# Altium PCB bOARD.PcbDoc
Units mil, origin at the board's own origin, x right, y up, seen from the top; angles counter-clockwise.
Board outline 6000 x 4000 mil, 2 copper layers (Top Layer, Bottom Layer); 34 components, 41 nets, 148 pads, 0 vias.
Unrouted connection lines stored in the file: 97.
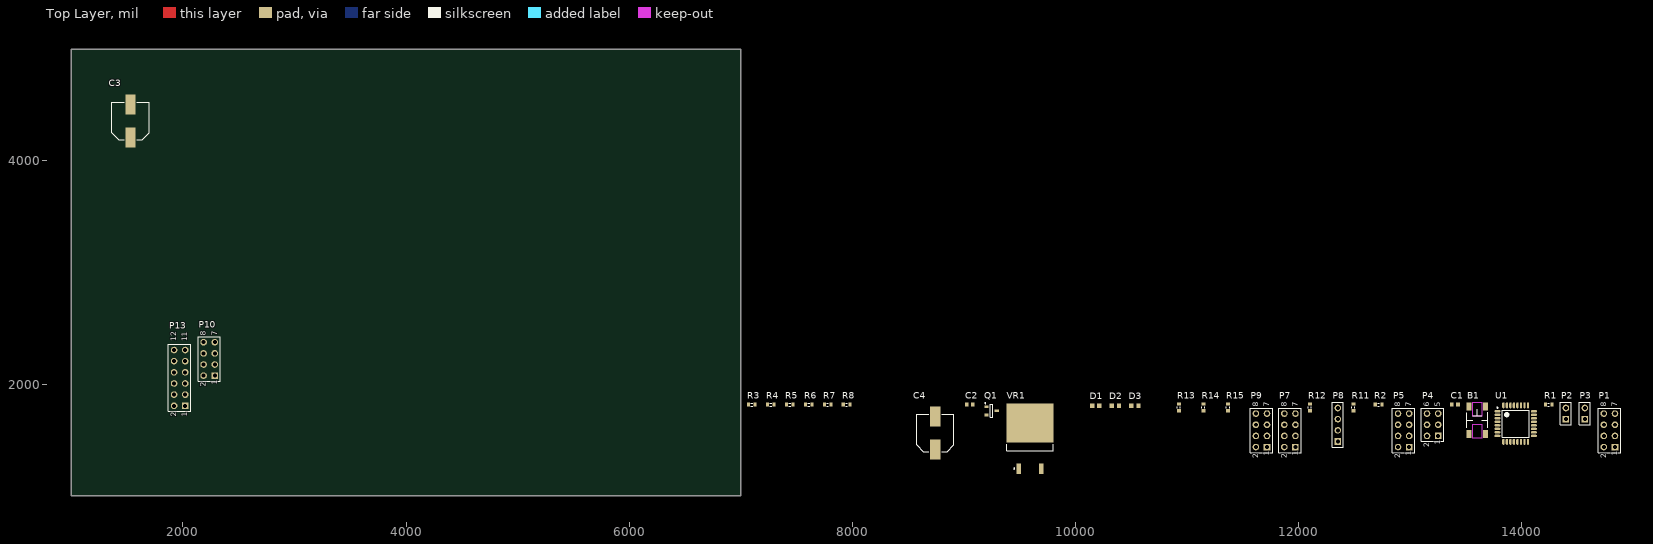
[diagram p0: Top Layer view]
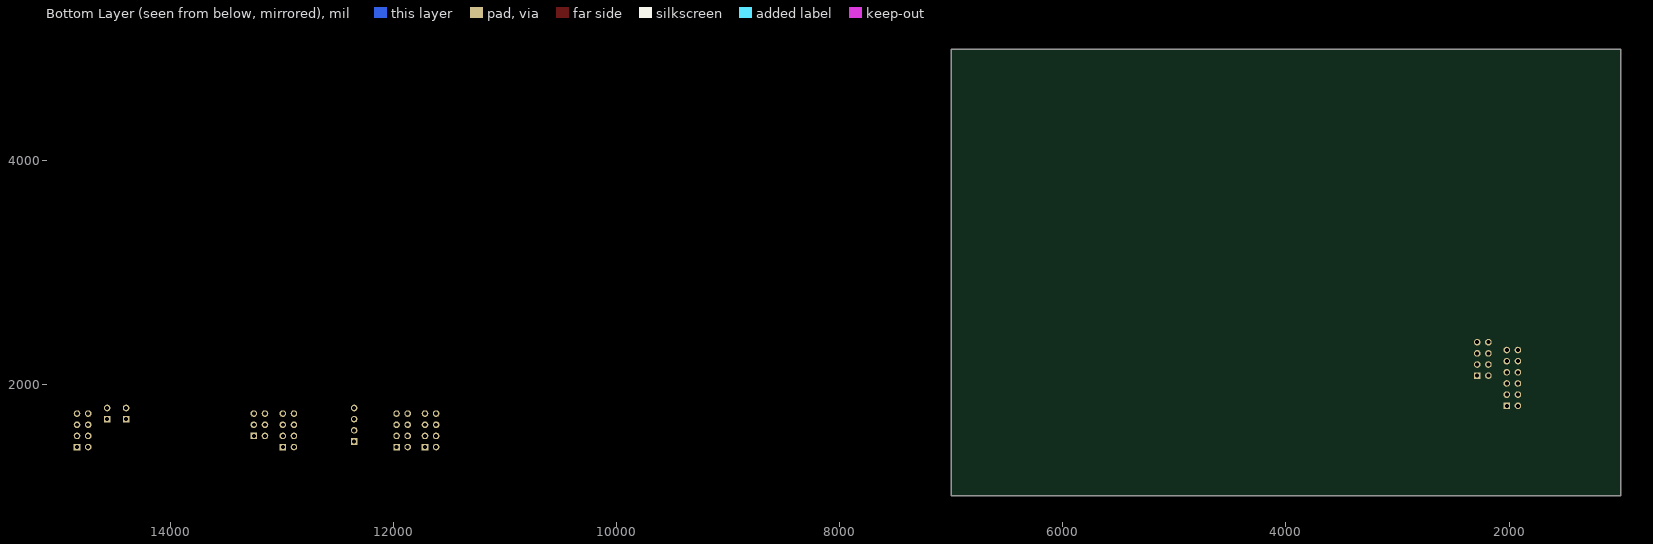
[diagram p1: Bottom Layer view, seen from below]

## Layer stack, top to bottom
Top Solder: solder mask 0.4, Solder Resist, Dk 3.5
Top Layer: signal copper 1.4
Dielectric 1: dielectric 12.6, FR-4, Dk 4.8
Bottom Layer: signal copper 1.4
Bottom Solder: solder mask 0.4, Solder Resist, Dk 3.5

## Board outline
1000,1000 7000,1000 7000,5000 1000,5000

## Design rules (kind name [scope] priority, off if disabled: settings)
Clearance [All] p1: gap=10
PolygonConnect [All] p1: connectstyle=Relief reliefconductorwidth=10 reliefentries=4 polygonreliefangle="90 Angle" airgapwidth=10
RoomDefinition Sheet1 [InComponentClass('Sheet1')] p1: confinementstyle=ConfineIn formatcopy=TRUE lockcomponents=FALSE outline 7045,1060 14900,1060 14900,1945 7045,1945
RoutingVias [All] p1: holewidth=28 width=50 viastyle="Through Hole" minholewidth=28 minwidth=50 maxholewidth=28 maxwidth=50
SolderMaskExpansion [All] p1: expansion=4
Width [All] p1: maxlimit=10 minlimit=10 preferedwidth=10
30 further rules are at their usual default settings.

## Components (designator, comment, footprint, x,y, rotation, side; value= is the part's Value field where it differs from the comment)
B1 "Button" "SMT Tactile Button" 13605,1675 r90 top
C1 "Cap" 1608[0603] 13405,1815 r0 top
C2 "Cap" 1608[0603] 9055,1815 r0 top
C3 "Cap Pol2" CAPAE9983X105M 1530,4360 r90 top
C4 "Cap Pol2" CAPAE9983X105M 8745,1560 r90 top
D1 "LED1" L0603 10185,1805 r0 top
D2 "LED1" L0603 10360,1805 r0 top
D3 "LED1" L0603 10535,1805 r0 top
P1 "Header 4X2" HDR2X4 14840,1435 r90 top
P2 "Header 2" HDR1X2 14400,1685 r90 top
P3 "Header 2" HDR1X2 14570,1685 r90 top
P4 "Header 3X2" HDR2X3 13255,1535 r90 top
P5 "Header 4X2" HDR2X4 12995,1435 r90 top
P7 "Header 4X2" HDR2X4 11975,1435 r90 top
P8 "Header 4" HDR1X4 12355,1485 r90 top
P9 "Header 4X2" HDR2X4 11720,1435 r90 top
P10 "Header 4X2" HDR2X4 2285,2075 r90 top
P13 "Header 6X2" HDR2X6 2020,1805 r90 top
Q1 "MOSFET-P" SOT23-3 9250,1760 r0 top
R1 "Res3" J1-0603 14245,1815 r0 top
R2 "Res3" J1-0603 12720,1815 r0 top
R3 "Res3" J1-0603 7100,1815 r0 top
R4 "Res3" J1-0603 7270,1815 r0 top
R5 "Res3" J1-0603 7440,1815 r0 top
R6 "Res3" J1-0603 7610,1815 r0 top
R7 "Res3" J1-0603 7780,1815 r0 top
R8 "Res3" J1-0603 7950,1815 r0 top
R11 "Res3" J1-0603 12495,1790 r90 top
R12 "Res3" J1-0603 12105,1790 r90 top
R13 "Res3" J1-0603 10930,1790 r90 top
R14 "Res3" J1-0603 11150,1790 r90 top
R15 "Res3" J1-0603 11370,1790 r90 top
U1 "ATmega32M1-AU" 32A_L 13950,1645 r0 top
VR1 "Volt Reg" D2PAK_N 9595,1510 r90 top

## Footprints (in the part's own frame and the unit in brackets; to place one, negate y for a bottom-side part, rotate by r counter-clockwise, add the part's x,y. Pads: shape width x height; smd on the part's side, far side on the other; paste and mask are expansions set on the pad)
32A_L [mm] "Thin QFP, 32-Leads, Body 7x7mm, Pitch 0.8mm, IPC High Density"
  oval 1.35x0.55 smd: 1(-4.15,2.8) 2(-4.15,2) 3(-4.15,1.2) 4(-4.15,0.4) 5(-4.15,-0.4) 6(-4.15,-1.2) 7(-4.15,-2) 8(-4.15,-2.8) 17(4.15,-2.8) 18(4.15,-2) 19(4.15,-1.2) 20(4.15,-0.4) 21(4.15,0.4) 22(4.15,1.2) 23(4.15,2) 24(4.15,2.8)
  oval 0.55x1.35 smd: 9(-2.8,-4.15) 10(-2,-4.15) 11(-1.2,-4.15) 12(-0.4,-4.15) 13(0.4,-4.15) 14(1.2,-4.15) 15(2,-4.15) 16(2.8,-4.15) 25(2.8,4.15) 26(2,4.15) 27(1.2,4.15) 28(0.4,4.15) 29(-0.4,4.15) 30(-1.2,4.15) 31(-2,4.15) 32(-2.8,4.15)
  silkscreen extent -4.27,-3.05 3.05,3.75, body extent -3.5,-3.5 3.5,3.5, height 1.2
1608[0603] [mm] "Chip Capacitor, Body 1.6x0.8mm, IPC High Density"
  rect 0.8x0.9 smd: 1(-0.7,0) 2(0.7,0)
  body extent -0.87,-0.48 0.87,0.48, height 1.3
CAPAE9983X105M [mm] "Aluminum Electrolytic Capacitor, Body 8.30x8.30x10.50mm, IPC Low Density"
  rect 4.55x2.3 smd: 1(-3.75,0) 2(3.75,0)
  silkscreen extent -4.25,-4.25 4.25,4.25, body extent -4.25,-4.25 4.25,4.25, height 10.5
D2PAK_N [mm] "D2-PAK, 4-Leads, Body 8.8x10.4mm, Pitch 2.54mm, Lead Span 15.1mm, IPC Medium Density"
  rect 2.4x1.05 smd: 1(-6.8,2.54) 3(-6.8,-2.54)
  rect 8.9x10.65 smd: 2(3.55,0)
  silkscreen extent -6.92,-5.25 -1.3,5.25, body extent -2.7,-5.28 6.3,5.28, height 4.69
HDR1X2 [mm] "Connector; Header; 2 Position"
  rect 1.5x1.5 hole 0.9: 1(0,0)
  round 1.5 hole 0.9: 2(2.54,0)
  silkscreen extent -1.27,-1.27 3.81,1.27
HDR1X4 [mm] "Connector; Header; 4 Position"
  rect 1.5x1.5 hole 0.9: 1(0,0)
  round 1.5 hole 0.9: 2(2.54,0) 3(5.08,0) 4(7.62,0)
  silkscreen extent -1.27,-1.27 8.89,1.27
HDR2X3 [mm] "Connector; Header; 3x2 Position"
  rect 1.5x1.5 hole 0.9: 1(0,0)
  round 1.5 hole 0.9: 2(0,2.54) 3(2.54,0) 4(2.54,2.54) 5(5.08,0) 6(5.08,2.54)
  silkscreen extent -1.27,-1.27 6.35,3.81
HDR2X4 [mm] "Connector; Header; 4x2 Position"
  rect 1.5x1.5 hole 0.9: 1(0,0)
  round 1.5 hole 0.9: 2(0,2.54) 3(2.54,0) 4(2.54,2.54) 5(5.08,0) 6(5.08,2.54) 7(7.62,0) 8(7.62,2.54)
  silkscreen extent -1.27,-1.27 8.89,3.81
HDR2X6 [mm] "Connector; Header; 6x2 Position"
  rect 1.5x1.5 hole 0.9: 1(0,0)
  round 1.5 hole 0.9: 2(0,2.54) 3(2.54,0) 4(2.54,2.54) 5(5.08,0) 6(5.08,2.54) 7(7.62,0) 8(7.62,2.54) 9(10.16,0) 10(10.16,2.54) 11(12.7,0) 12(12.7,2.54)
  silkscreen extent -1.27,-1.27 13.97,3.81
J1-0603 [mm] "Chip Resistor, Body 1.6x0.8mm, IPC High Density"
  rect 0.7x0.9 smd: 1(-0.75,0) 2(0.75,0)
  silkscreen extent -0.2,-0.35 0.2,0.35, body extent -0.85,-0.48 0.85,0.48, height 0.9
L0603 [mm]
  rect 0.95x1 smd: 1(-0.8,0) 2(0.8,0)
"SMT Tactile Button" [mm]
  rect 1.8x1.1 smd: 1(3.1,1.85) 2(-3.1,1.85) 3(-3.1,-1.85) 4(3.1,-1.85)
  Top Layer keep-out region: -4,-1.125 -1,-1.125 -1,1.125 -4,1.125
  Top Layer keep-out region: 1.025,-1.125 4.025,-1.125 4.025,1.125 1.025,1.125
  silkscreen extent -1.75,-2.4 2.5,2.4
SOT23-3 [mm]
  rect 1x0.6 smd: 1(-1.15,0.95) 2(-1.15,-0.95) 3(1.15,0)
  silkscreen extent -1.52,-1.45 0.33,1.87

## Part data
B1: library part Switch
C1 C2: "Capacitor"
C3 C4: "Polarized Capacitor (Axial)"
D1 D2 D3: "Typical RED GaAs LED"
P1 P5 P7 P9 P10: "Header, 4-Pin, Dual row"
P2 P3: "Header, 2-Pin"
P4: "Header, 3-Pin, Dual row"
P8: "Header, 4-Pin"
P13: "Header, 6-Pin, Dual row"
Q1: "P-Channel MOSFET"
R1 R2 R3 R4 R5 R6 R7 R8 R11 R12 R13 R14 R15: "Resistor"
U1: "8-bit AVR Microcontroller, 2.7-5.5V, 16MHz, 32KB Flash, 1KB EEPROM, 2KB SRAM, Industrial Grade (-40° to +85°C), 32-Pin TQFP"
VR1: "Voltage Regulator"

## Nets (pads, with @x,y where several pads share a name; then routed paths per layer and width w, separated by ;. In a path a pad name is that pad's centre, name@x,y a point inside that pad or via, vN(x,y) a via of type N, cw(c..) or ccw(c..) an arc to the next point about the centre after c; other vN are vias at no path point)
3S(11.1V): C3.1 C4.1 P1.4 P2.1 P3.1 P5.4 P7.4 P9.4 P10.4 VR1.1
5V: C1.2 C2.2 P1.2 P4.2 P5.2 P7.2 P8.1 P9.2 P10.2 Q1.1 R1.2 R3.2 R4.2 R5.2 U1.4 U1.19 VR1.3
GND: B1.2 C1.1 C2.1 C3.2 C4.2 D1.2 D2.2 D3.2 P1.8 P2.2 P3.2 P4.6 P5.8 P7.8 P8.2 P9.8 P10.8 P13.2 P13.4 P13.6 P13.8 P13.10 P13.12 R12.2 U1.5 U1.20 VR1.2
HI-BEAM: Q1.2 U1.15
M1.1: P5.5 U1.17
M1.2: P5.7 U1.16
M2.1: P7.5 U1.24
M2.2: P7.7 U1.23
M3.1: P9.5 U1.26
M3.2: P9.7 U1.7
M4.1: P10.5 U1.32
M4.2: P10.7 U1.18
MISO: P4.1 P5.3 P9.1 U1.8
MOSI: P4.4 P5.1 U1.9
NetD1_1: D1.1 R13.1
NetD2_1: D2.1 R14.1
NetD3_1: D3.1 R15.1
NetQ1_3: Q1.3 R6.2 R7.2 R8.2
NetR11_2: R11.2 R12.1
PULSE: R15.2 U1.11
PWMM2.1: P7.1 U1.10
PWMM2.2: P7.3 U1.1
PWMM3.1: U1.3
PWMM3.2: P9.3 U1.27
PWMM4.1: P4.3 P10.1 U1.30
PWMM4.2: P10.3 U1.28
PWMM5.1: U1.29
RESET: B1.4 P4.5 R1.1 U1.31
RXD: R2.1 R14.2 U1.12
RXD_3.3V: P8.4 R2.2 R11.1
S1-IN1: P1.1 U1.22
S1-IN2: P1.3 U1.25
S1-IN3: P1.5 U1.13
S1-IN4: P1.7 U1.14
TORCH1: P13.1 R3.1
TORCH2: P13.3
TORCH3: P13.5 R5.1
TORCH4: P13.7 R6.1
TORCH5: P13.9 R7.1
TORCH6: P13.11 R8.1
TXD: P8.3 R13.2 U1.2
pads on no net: B1.1 B1.3 P1.6 P5.6 P7.6 P9.6 P10.6 R4.1 U1.6 U1.21

## Text inside footprints (layer, text, board x,y; h text height)
P1: Top Overlay "2" at 14760,1335 h50 r90; Top Overlay "1" at 14860,1355 h50 r90; Top Overlay "7" at 14860,1795 h50 r90; Top Overlay "8" at 14760,1795 h50 r90
P4: Top Overlay "6" at 13175,1795 h50 r90; Top Overlay "5" at 13275,1795 h50 r90; Top Overlay "2" at 13175,1435 h50 r90; Top Overlay "1" at 13275,1455 h50 r90
P5: Top Overlay "2" at 12915,1335 h50 r90; Top Overlay "1" at 13015,1355 h50 r90; Top Overlay "7" at 13015,1795 h50 r90; Top Overlay "8" at 12915,1795 h50 r90
P7: Top Overlay "2" at 11895,1335 h50 r90; Top Overlay "1" at 11995,1355 h50 r90; Top Overlay "7" at 11995,1795 h50 r90; Top Overlay "8" at 11895,1795 h50 r90
P9: Top Overlay "2" at 11640,1335 h50 r90; Top Overlay "1" at 11740,1355 h50 r90; Top Overlay "7" at 11740,1795 h50 r90; Top Overlay "8" at 11640,1795 h50 r90
P10: Top Overlay "2" at 2205,1975 h50 r90; Top Overlay "1" at 2305,1995 h50 r90; Top Overlay "7" at 2305,2435 h50 r90; Top Overlay "8" at 2205,2435 h50 r90
P13: Top Overlay "12" at 1940,2385 h50 r90; Top Overlay "1" at 2040,2425 h50 r90; Top Overlay "1" at 2040,2385 h50 r90; Top Overlay "1" at 2040,1705 h50 r90; Top Overlay "2" at 1940,1705 h50 r90